# Altium PCB ch340_usbc.PcbDoc
Units mm, origin at the board's own origin, x right, y up, seen from the top; angles counter-clockwise.
Board outline 30 x 17 mm, 2 copper layers (Top Layer, Bottom Layer); 14 components, 13 nets, 54 pads, 15 vias.
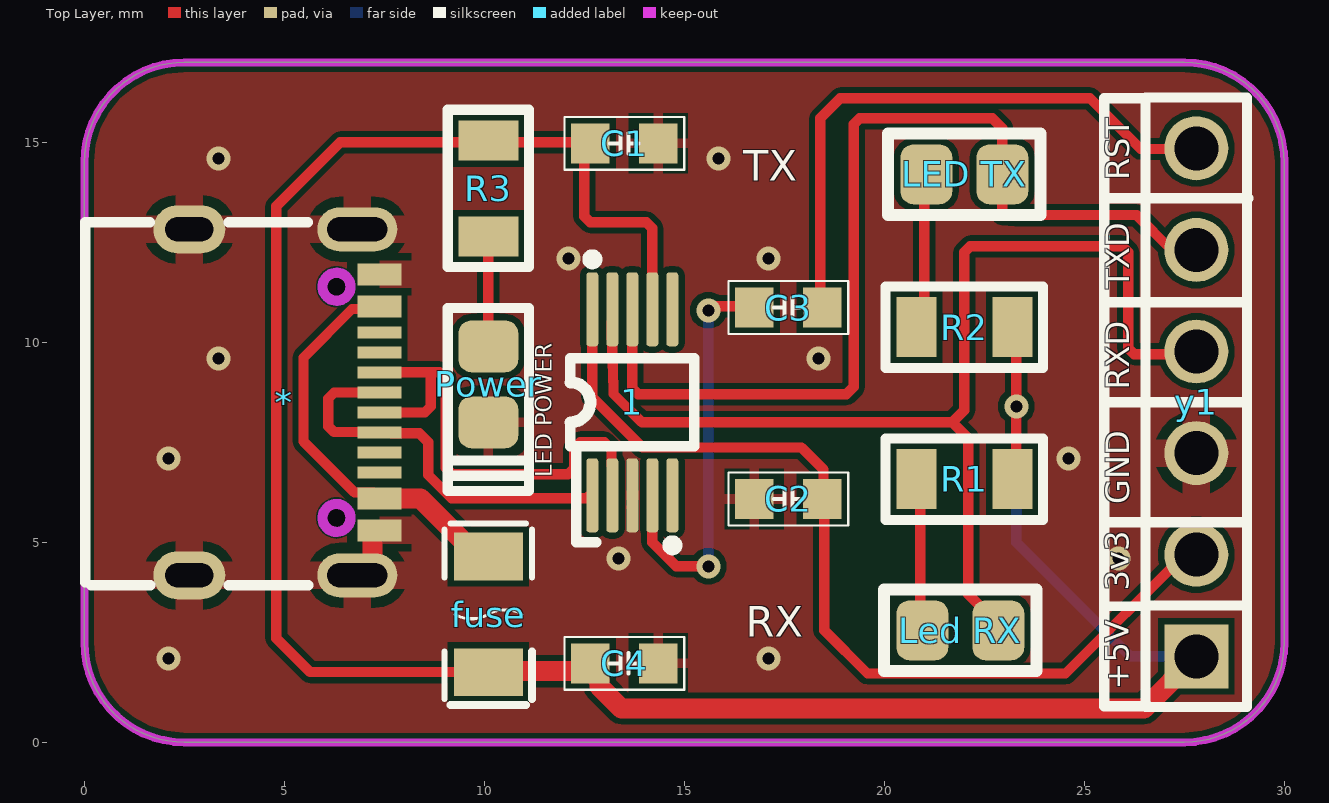
[diagram p0: Top Layer view]
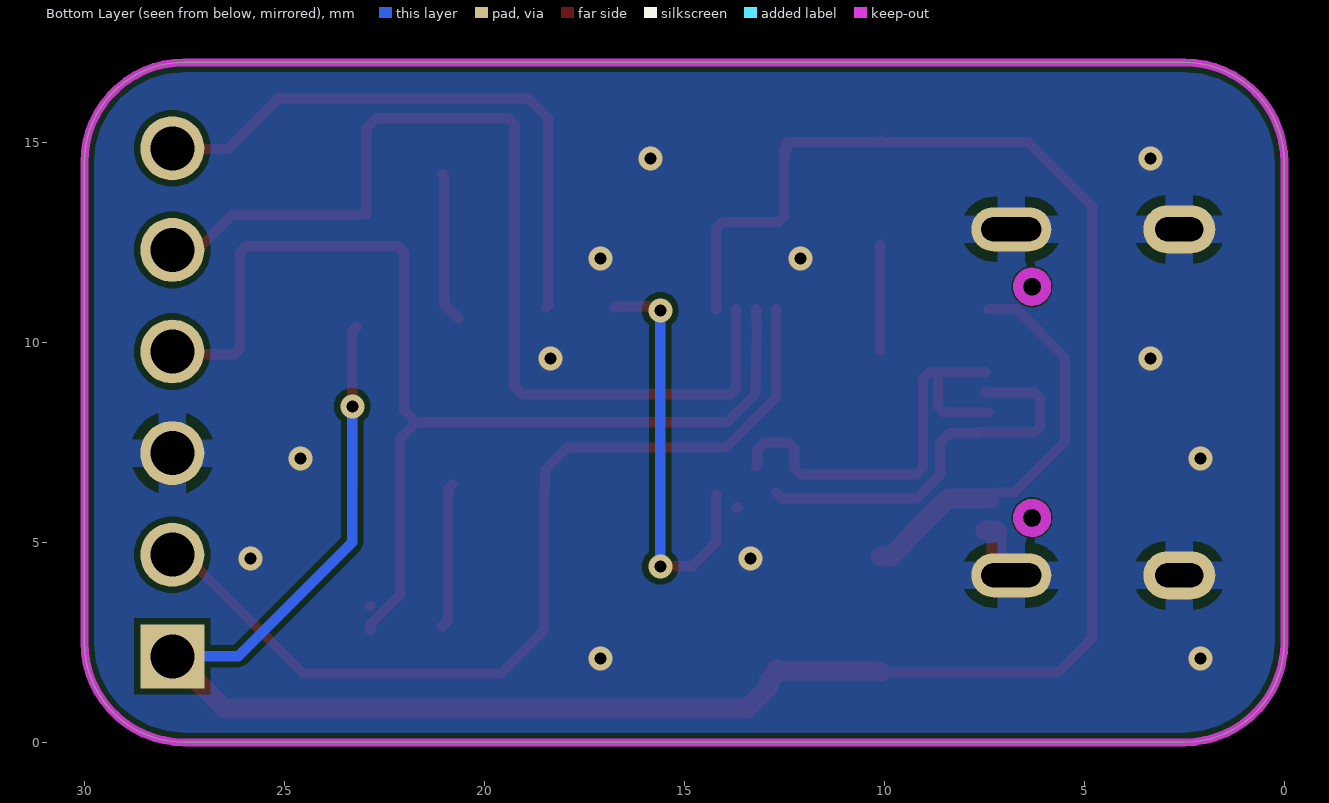
[diagram p1: Bottom Layer view, seen from below]
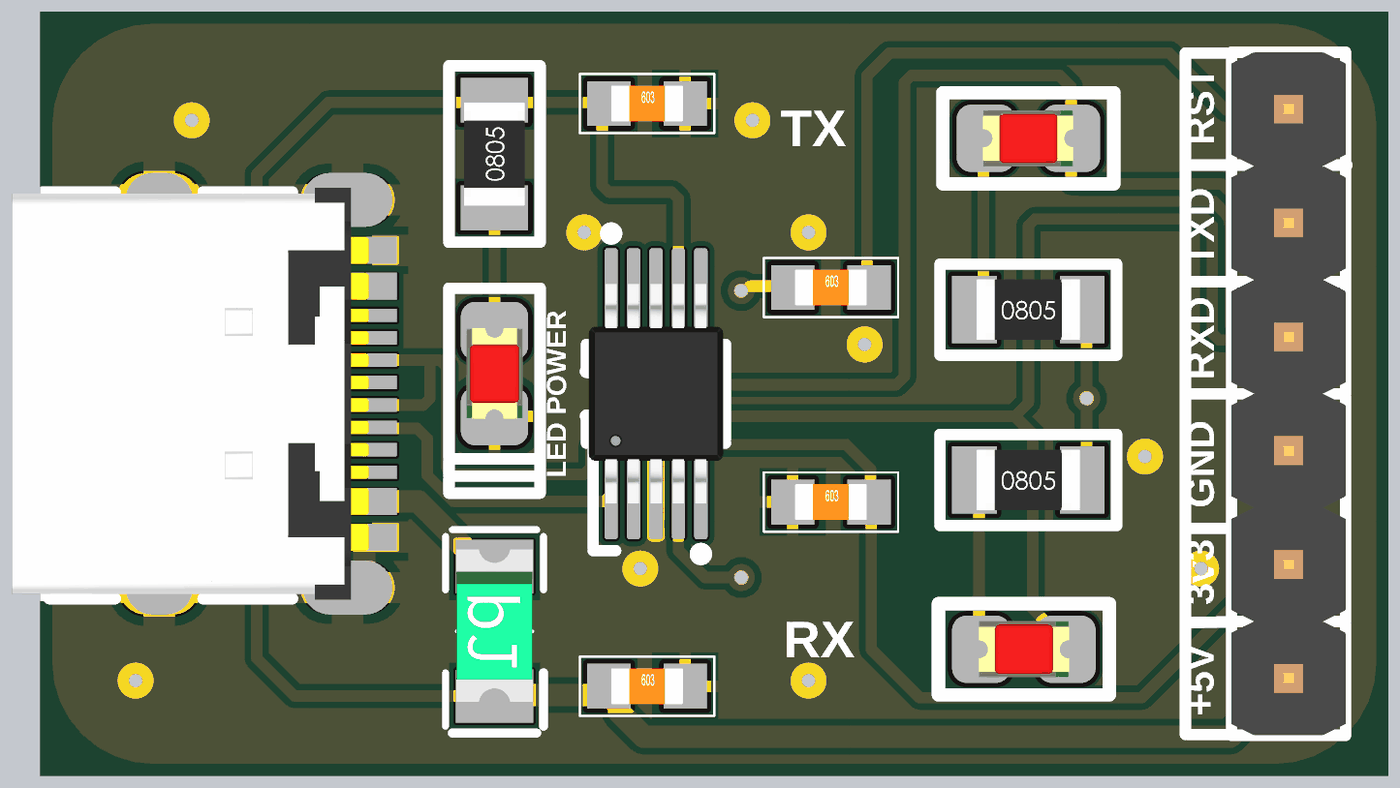
[diagram p2: 3D render of the assembled board from above, using the file's embedded part models]

## Layer stack, top to bottom
Top Solder: solder mask 0.0102, Solder Resist, Dk 3.5
Top Layer: signal copper 0.0356
Dielectric 1: dielectric 0.32, FR-4, Dk 4.8
Bottom Layer: signal copper 0.0356
Bottom Solder: solder mask 0.0102, Solder Resist, Dk 3.5

## Board outline
2.5,0 cw(c2.5,2.5) 0,2.5 0,14.5 cw(c2.5,14.5) 2.5,17 27.5,17 cw(c27.5,14.5) 30,14.5 30,2.5 cw(c27.5,2.5) 27.5,0

## Design rules (kind name [scope] priority, off if disabled: settings)
Clearance [All] p1: gap=0.152 ignorepadtopadclearanceinfootprint=FALSE except(0: Text-Hole; 0.14: Arc-SMDPad Arc-Fill Arc-Poly Arc-Region Track-SMDPad Track-Fill Track-Poly Track-Region SMDPad-SMDPad; 0.175: SMDPad-Hole THPad-Hole Via-Hole Fill-Hole Poly-Hole Region-Hole; 0.178: Arc-Arc Arc-Track Arc-THPad Arc-Via Arc-Text Arc-Hole Track-Track Track-THPad Track-Via Track-Text Track-Hole; 0.254: Text-Text)
Clearance Clearance_net [InNet('+3.3V')   or         InNet('+5V')  or         InNet('D+')       or         InNet('D-')          or         InNet('RXD')        or         InNet('TXD')   or         InNet('GND')     or         InNet('Net1_4')] p2: gap=0.152 ignorepadtopadclearanceinfootprint=FALSE except(0.14: Arc-SMDPad Arc-Fill Arc-Poly Arc-Region Track-SMDPad Track-Fill Track-Poly Track-Region SMDPad-Fill SMDPad-Poly SMDPad-Region)
Clearance Clearance_asm111 [HasFootprint('ADS1115 SMD')] p3: gap=0.2 ignorepadtopadclearanceinfootprint=FALSE except(0.15: SMDPad-Poly)
Clearance Clearance_5v [InNet('+5V')] p4: gap=0.2 ignorepadtopadclearanceinfootprint=FALSE
Clearance Clearance_USBC [HasFootprint('USB-C-SMD_TYPE-C-6PIN-2MD-073')] p5: gap=0.152 ignorepadtopadclearanceinfootprint=FALSE except(0: Text-Hole; 0.175: SMDPad-Hole THPad-Hole Via-Hole Fill-Hole Poly-Hole Region-Hole; 0.178: Arc-Arc Arc-Track Arc-SMDPad Arc-THPad Arc-Via Arc-Fill Arc-Poly Arc-Region Arc-Text Arc-Hole Track-Track Track-SMDPad Track-THPad Track-Via Track-Fill Track-Poly Track-Region Track-Text Track-Hole; 0.254: Text-Text)
PolygonConnect PolygonConnect_gnd_led [HasFootprint('Led 0805R')] p1: connectstyle=Relief reliefconductorwidth=0.254 reliefentries=4 polygonreliefangle="90 Angle" airgapwidth=0.254
PolygonConnect PolygonConnect_c [HasFootprint('C-0603')] p2: connectstyle=Relief reliefconductorwidth=0.254 reliefentries=4 polygonreliefangle="90 Angle" airgapwidth=0.254
PolygonConnect PolygonConnect_gnd_j1 [HasFootprint('JP6-D1T')] p3: connectstyle=Relief reliefconductorwidth=0.7 reliefentries=4 polygonreliefangle="90 Angle" airgapwidth=0.254
PolygonConnect PolygonConnect_gnd_usb [HasFootprint('USB-C-SMD_TYPE-C-6PIN-2MD-073')] p4: connectstyle=Relief reliefconductorwidth=0.7 reliefentries=4 polygonreliefangle="90 Angle" airgapwidth=0.254
PolygonConnect PolygonConnect_pad [HasPad('*-1')        or HasPad('*-12')] p5: connectstyle=Relief reliefconductorwidth=0.7 reliefentries=4 polygonreliefangle="90 Angle" airgapwidth=0.254
PolygonConnect PolygonConnect_via [IsVia] p6: connectstyle=Direct reliefconductorwidth=0.7 reliefentries=4 polygonreliefangle="90 Angle" airgapwidth=0.254
RoutingVias [All] p1: holewidth=0.3 width=0.6 viastyle="Through Hole" minholewidth=0 minwidth=0.3 maxholewidth=0.3 maxwidth=0.6
SolderMaskExpansion [All] p1: expansion=0.102 istentingtop=FALSE
Width Width_Vbus [All] p1: maxlimit=1 minlimit=0.254 preferedwidth=0.5 minimp=50.000000 maximp=50.000000 favimp=50.000000
Width Width_5v [InNet('+5V')] p2: maxlimit=1 minlimit=0.254 preferedwidth=0.5 minimp=50.000000 maximp=50.000000 favimp=50.000000
Width Width_ALL [All] p3: maxlimit=0.254 minlimit=0.254 preferedwidth=0.254
30 further rules are at their usual default settings.

## Components (designator, comment, footprint, x,y, rotation, side; value= is the part's Value field where it differs from the comment)
1 "CH340E" "ADS1115 SMD" 13.7,8.5 r0 top
* "USB_6PIN" USB-C-SMD_TYPE-C-6PIN-2MD-073 5,8.5 r270 top
C1 "CAP SMD" C-0603 13.5,15 r180 top
C2 "100nF" C-0603 17.6,6.11 r180 top
C3 "100nF" C-0603 17.6,10.895 r180 top
C4 "100nF" C-0603 13.5,2 r180 top
fuse "SMD1206B200TF" F1206 10.1,3.2 r270 top
"Led RX" "LED-0805RVC" "Led 0805R_2" 21.9,2.8 r0 top value=Red
"LED TX" "LED-0805RVC" "Led 0805R_2" 22,14.2 r0 top value=Red
Power "LED-0805RVC" "Led 0805R" 10.1,8.95 r270 top value=Red
R1 "10k" "Resistor 0805" 22,6.577 r0 top
R2 "10K" "Resistor 0805" 22,10.377 r0 top
R3 "10K" "Resistor 0805" 10.1,13.847 r90 top
y1 "JP6" JP6-D1T 27.8,2.15 r90 top

## Footprints (in the part's own frame and the unit in brackets; to place one, negate y for a bottom-side part, rotate by r counter-clockwise, add the part's x,y. Pads: shape width x height; smd on the part's side, far side on the other; paste and mask are expansions set on the pad)
"ADS1115 SMD" [mm] "MSOP-10, 16-Bit  Analog-to-Digital"
  rrect50% 0.3x1.85 smd mask+0.05: 1(-1,-2.325) 2(-0.5,-2.325) 3(0,-2.325) 4(0.5,-2.325) 5(1,-2.325) 6(1,2.325) 7(0.5,2.325) 8(0,2.325) 9(-0.5,2.325) 10(-1,2.325)
  silkscreen extent -1.55,-3.67 1.55,3.67, body extent -1.5,-2.45 1.5,2.45, height 1.15
C-0603 [mil]
  rect 38x39.37 smd: 1(-33.46,1) 2(33.46,1)
  silkscreen extent -59,-25 59,27, body extent -31,-15 31,17, height 12
F1206 [mm]
  rect 1.19x1.728 smd paste+0 mask+0.051: 1(-1.445,0) 2(1.445,0)
  silkscreen extent -2.27,-1.09 2.27,1.09, body extent -1.83,-0.85 1.57,0.85, height 0.61
JP6-D1T [mm] "6 pins, 1 row, straight, gold plating"
  rect 1.6x1.6 hole 1.1: 1(0,0)
  round 1.6 hole 1.1: 2(2.54,0) 3(5.08,0) 4(7.62,0) 5(10.16,0) 6(12.7,0)
  silkscreen extent -1.27,-1.27 13.97,1.27, body extent -1.27,-1.27 13.97,1.27, height 8.54
"Led 0805R" [mm] "Chip LED; RED ; Body 2.0 x 1.3 mm (LxW typ)"
  rrect50% 1.3x1.5 smd: 1(-0.95,0) 2(0.95,0)
  silkscreen extent -1.91,-1.02 2.67,1.02, body extent -1.01,-0.63 1.01,0.62, height 1.1
"Led 0805R_2" [mm] "Chip LED; RED ; Body 2.0 x 1.3 mm (LxW typ)"
  rrect50% 1.3x1.5 smd: 1(-0.95,0) 2(0.95,0)
  silkscreen extent -1.91,-1.02 1.91,1.02, body extent -1.01,-0.63 1.01,0.62, height 1.1
"Resistor 0805" [mm]
  rect 1x1.5 smd: 1(-1.2,0) 2(1.2,0)
  silkscreen extent -1.97,-1.02 1.97,1.02, body extent -1.15,-0.67 1.15,0.68, height 0.73
USB-C-SMD_TYPE-C-6PIN-2MD-073 [mm]
  rect 0.55x1.1 smd paste-100 mask+0.05: 1(-3.2,2.375) 2(-2.4,2.375) 11(2.4,2.375) 12(3.2,2.375)
  rect 0.3x1.1 smd paste-100 mask+0.05: 3(-1.75,2.375) 4(-1.25,2.375) 5(-0.75,2.375) 6(-0.25,2.375) 7(0.25,2.375) 8(0.75,2.375) 9(1.25,2.375) 10(1.75,2.375)
  oval 1.2x1.8 hole 0.6 slot 1.2 at 90 deg paste+0 mask+0.05: 13(-4.325,-2.375) 14(4.325,-2.375)
  oval 1.1x2 hole 0.6 slot 1.5 at 90 deg paste+0 mask+0.05: 13(-4.325,1.825) 14(4.325,1.825)
  Keep-Out Layer board cut-out: 3.24,1.305 3.191,1.477 3.063,1.603 2.89,1.649 2.717,1.603 2.589,1.477 2.54,1.305 2.54,1.305 2.589,1.133 2.717,1.007 2.89,0.961 3.063,1.007 3.191,1.133 3.24,1.305
  Keep-Out Layer board cut-out: -2.54,1.305 -2.589,1.477 -2.717,1.603 -2.89,1.649 -3.063,1.603 -3.191,1.477 -3.24,1.305 -3.24,1.305 -3.191,1.133 -3.063,1.007 -2.89,0.961 -2.717,1.007 -2.589,1.133 -2.54,1.305
  Keep-Out Layer circle w0.254: c2.89,1.305 r0.35
  Keep-Out Layer circle w0.025: c2.89,1.305 r0.35
  Keep-Out Layer circle w0.254: c-2.89,1.305 r0.35
  Keep-Out Layer circle w0.025: c-2.89,1.305 r0.35
  silkscreen extent -4.5,-4.97 4.57,0.6, body extent -4.6,-5.65 4.6,2.3, height 3.4

## Part data
C1: "Capacitor Polarised", Arrow Part Number=TAJC227K006RNJV, Manufacturer_Name=AVX, Mouser Part Number=581-TAJC227K006RNJV, Arrow Price/Stock=https://www.arrow.com/en/products/tajc227k006rnjv/avx, Datasheet Link=http://datasheets.avx.com/TAJ.pdf, Height=2.8mm, Manufacturer_Part_Number=TAJC227K006RNJV, Mouser Price/Stock=https://www.mouser.co.uk/ProductDetail/AVX/TAJC227K006RNJV?qs=k4kUdCzLgS5cVBAajWRJdQ%3D%3D
C2 C3 C4: library part "CAP SMD", "Capacitor Polarised", Arrow Part Number=TAJC227K006RNJV, Manufacturer_Name=AVX, Mouser Part Number=581-TAJC227K006RNJV, Arrow Price/Stock=https://www.arrow.com/en/products/tajc227k006rnjv/avx, Datasheet Link=http://datasheets.avx.com/TAJ.pdf, Height=2.8mm, Manufacturer_Part_Number=TAJC227K006RNJV, Mouser Price/Stock=https://www.mouser.co.uk/ProductDetail/AVX/TAJC227K006RNJV?qs=k4kUdCzLgS5cVBAajWRJdQ%3D%3D
"Led RX" "LED TX" Power: "LED Red 2mA 1.8V 0805", ComponentLink1Description=Datasheet, ComponentLink1URL="D:\Dropbox\Datasheets\Opto and Illumination\LEDs\SMD LED.pdf", Unit Price=0.0476
R1: library part res_0603
R2 R3: library part Resistor, "Resistor"

## Via types
v1: diameter 0.6, hole 0.3, Top Layer to Bottom Layer, 12 vias
v2: diameter 0.6, hole 0.3, Top Layer to Bottom Layer, tented both sides, 3 vias

## Nets (pads, with @x,y where several pads share a name; then routed paths per layer and width w, separated by ;. In a path a pad name is that pad's centre, name@x,y a point inside that pad or via, vN(x,y) a via of type N, cw(c..) or ccw(c..) an arc to the next point about the centre after c; other vN are vias at no path point)
+3.3V: 1.10 C2.1 y1.2 | length 23.7
  Top Layer w0.254: 1.10 12.7,8.705 12.7,8.627 13.96,7.367 17.933,7.367 18.484,6.816 18.484,6.35 18.5,6.334 18.5,2.799 19.579,1.719 24.531,1.719 27.521,4.709 27.781,4.709 y1.2
+5V: 1.7 C1.2 C4.2 fuse.2 R1.2 R2.2 R3.2 y1.1 | length 62.6
  Top Layer w0.254: fuse.2 5.645,1.755 4.8,2.6 4.8,13.4 6.4,15 10.052,15 R3.2 10.148,15 12.444,15 C1.2@12.444,14.8 ; C1.2@12.5,14.8 12.5,13.149 12.649,13 14.051,13 14.2,12.851 1.7 ; R2.2 23.3,10.277 R1.2@23.3,6.4
  Top Layer w0.5: fuse.2 fuse.2@10.122,1.777 ; fuse.2@10.322,1.777 C4.2@12.5,1.777 ; C4.2@12.7,1.824 12.65,1.775 12.883,1.542 12.883,1.391 13.427,0.847 26.497,0.847 y1.1
  Bottom Layer w0.254: v2(23.3,8.4) 23.3,5 26.15,2.15 y1.1 y1.1@27.8,1.58
D+: 1.1 *.6 *.8 | length 10
  Top Layer w0.254: *.6@7.475,8.75 7.47,8.745 6.249,8.745 6.1,8.597 6.1,7.903 6.249,7.755 7.659,7.755 7.687,7.727 8.375,7.727 8.6,7.503 8.6,6.685 9.185,6.1 12.558,6.1 1.1@12.707,6.249
D-: 1.2 *.5 *.7 | length 11.4
  Top Layer w0.254: *.7@7.4,8.245 8.511,8.245 8.659,8.394 8.659,9.241 8.65,9.25 ; *.5@7.475,9.25 8.65,9.25 ; 1.2@13.2,6.9 13.177,6.923 13.177,7.323 13,7.5 12.394,7.5 12.245,7.351 12.245,6.849 12.096,6.7 9.196,6.7 9.032,6.864 9.032,9.101 8.883,9.25 8.65,9.25
GND: 1.3 *.1 *.12 *.13 *.14 C1.1 C2.2 C4.1 Power.2 y1.3 | length 1.6
  Top Layer w0.254: 1.3@13.677,5.879 1.3@13.7,5.856
  Top Layer w0.5: *.14@6.825,4.175 ccw(c6.825,4.55) 6.907,4.184 ccw(c6.825,4.55) 7.2,4.55 *.12@7.2,5.2 ; *.12@7.175,5.275 7.2,5.3 *.12 *.12@7.475,5.3
  other v1: 2.1,2.1 17.1,2.1 13.35,4.6 25.85,4.6 2.1,7.1 24.6,7.1 3.35,9.6 18.35,9.6 12.1,12.1 17.1,12.1 3.35,14.6 15.85,14.6
Net1_4: 1.4 C3.2 | length 10.4
  Top Layer w0.254: 1.4 14.2,5 14.8,4.4 v2(15.6,4.4) ; v2(15.6,10.8) 15.694,10.8 15.794,10.9 16.72,10.9 C3.2
  Bottom Layer w0.254: v2(15.6,4.4) v2(15.6,10.8)
"NetLed RX_1": "Led RX.1" R1.1 | length 3.6
  Top Layer w0.254: R1.1@20.8,6.444 20.9,6.344 20.9,3.05 21.05,2.9
"NetLED TX_1": "LED TX.1" R2.1 | length 3.8
  Top Layer w0.254: R2.1@20.65,10.6 21,10.95 21,14.15 21.05,14.2
NetPower_1: Power.1 R3.1 | length 2.6
  Top Layer w0.254: Power.1@10.1,9.8 R3.1@10.1,12.448
RST: C3.1 y1.6 | length 14.7
  Top Layer w0.254: C3.1 18.4,10.92 18.4,15.6 18.9,16.1 25.143,16.1 26.411,14.832 27.248,14.832 y1.6@27.488,14.592
RXD: 1.9 "Led RX.2" y1.4 | length 29.4
  Top Layer w0.254: 1.9 13.187,10.257 13.187,10.254 13.187,10.247 13.229,8.807 13.229,8.709 13.303,8.635 13.938,8 21.6,8 21.7,8 ; 22.843,3.4 22.85,3.4 ; 22.85,2.8 22.85,2.95 22.1,3.7 22.1,7.6 21.7,8 ; y1.4 27.73,9.7 26.249,9.7 26.1,9.849 26.1,12.251 25.951,12.4 22.149,12.4 22,12.251 22,8.3 21.7,8
TXD: 1.8 "LED TX.2" y1.5 | length 25.5
  Top Layer w0.254: 1.8 13.7,8.849 13.849,8.7 19.051,8.7 19.237,8.886 19.237,15.451 19.386,15.6 22.7,15.6 22.95,15.35 22.95,14.2 22.95,13.2 23.275,13.179 26.31,13.179 27.179,12.31 y1.5
VBUS: *.2 *.11 fuse.1 | length 10.4
  Top Layer w0.254: *.11 7.227,6.248 6.752,6.248 5.482,7.518 5.482,9.622 6.693,10.833 *.2@7.409,10.833
  Top Layer w0.5: *.11 8.4,6.1 9.486,5.014 9.486,4.99 9.831,4.645 fuse.1
pads on no net: 1.5 1.6 *.3 *.4 *.9 *.10

## Polygon pours and split planes (outlines as drawn)
GND on Top Layer "GND_L01_P000" (solid, remove dead copper, pour order 0): 0.021,14.65 0.021,2.25 ccw(c2.321,2.25) 2.321,-0.05 27.621,-0.05 ccw(c27.621,2.35) 30.021,2.35 30.021,14.41 ccw(c27.481,14.41) 27.481,16.95 2.321,16.95 ccw(c2.321,14.65)
GND on Bottom Layer "GND_L02_P001" (solid, remove dead copper, pour order 1): 0,14.7 0,2.3 ccw(c2.3,2.3) 2.3,0 27.6,0 ccw(c27.6,2.4) 30,2.4 30,14.46 ccw(c27.46,14.46) 27.46,17 2.3,17 ccw(c2.3,14.7)

## Keep-outs
Keep-Out Layer:
  the board outline again, w0.2

## Silkscreen, mask and mechanical layers (free items; w line width, h text height)
Top Overlay:
  lines w0.254: 25.5,13.5 25.5,16.1 26.5,16.1 ; 25.5,13.6 25.5,11 ; 25.6,5.5 29,5.5 ; 25.6,13.6 29.1,13.6 ; 26.53,3.42 26.522,3.412 25.5,3.392 25.5,3.4 ; 26.6,0.9 25.5,0.9 25.5,3.4 ; 29,11 25.5,11 ; 29.07,8.5 25.5,8.5 ; 25.5,3.4 25.5,8.5 ; 25.5,8.5 25.5,11
  text "RST" at 26.32,14.048 h1 r90
  text "TX" at 16.476,13.784 h1.3
  text "TXD" at 26.32,11.338 h1 r90
  text "RXD" at 26.32,8.811 h1 r90
  text "LED POWER" at 11.824,6.629 h0.7 r90
  text "GND" at 26.32,5.95 h1 r90
  text "3v3" at 26.316,3.79 h1 r90
  text "RX" at 16.537,2.384 h1.3
  text "+5V" at 26.314,1.31 h1 r90

## Text inside footprints (layer, text, board x,y; h text height)
1: Mechanical 1 "10" at 12.3,9.1 h0.8; Mechanical 1 "6" at 14.5,9.1 h0.8; Mechanical 1 "5" at 14.5,7.1 h0.8